# Altium PCB CurrentSenseTest_PCB.PcbDoc
Units mil, origin at the board's own origin, x right, y up, seen from the top; angles counter-clockwise.
Board outline 1000 x 900 mil, 2 copper layers (Top Layer, Bottom Layer); 10 components, 9 nets, 45 pads, 4 vias.
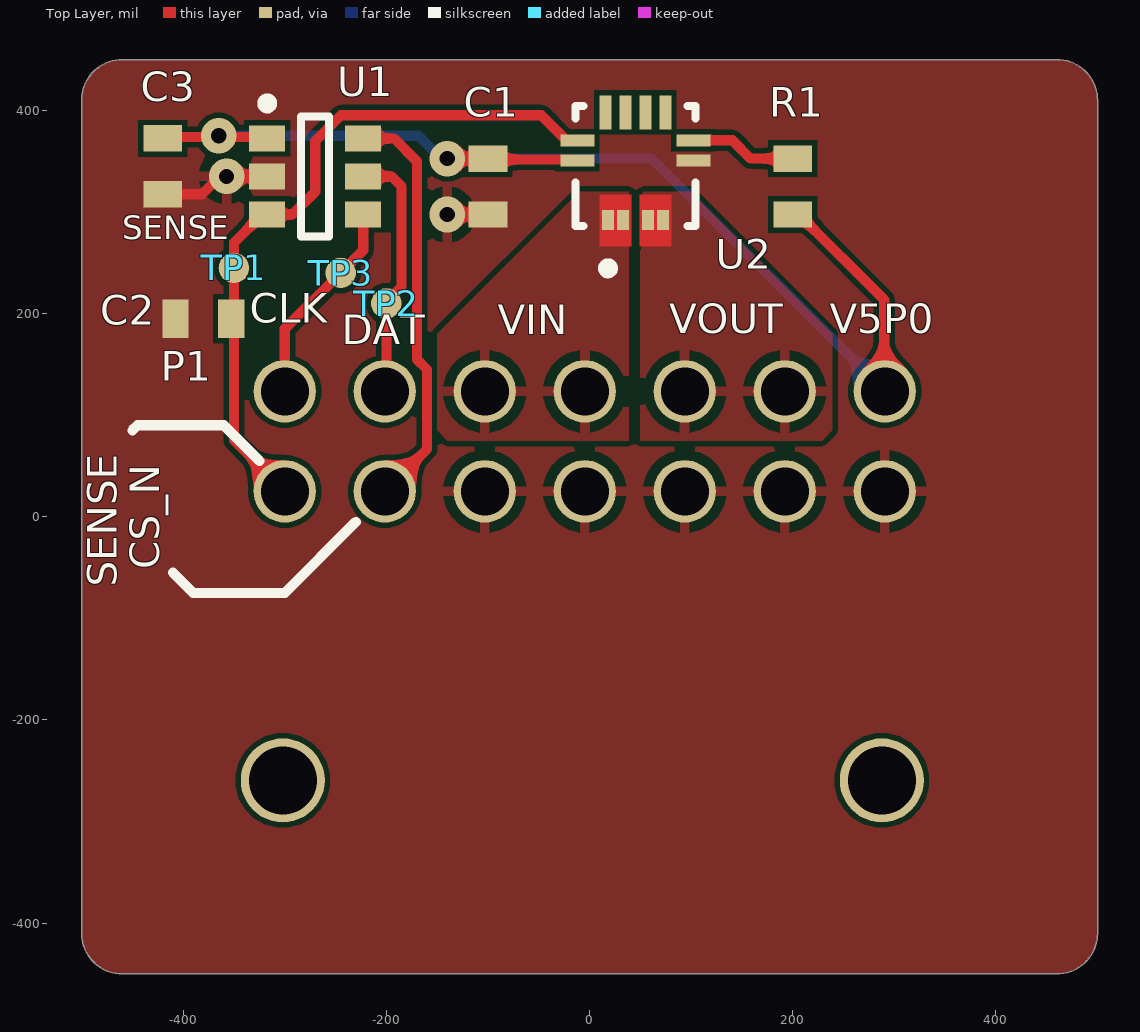
[diagram p0: Top Layer view]
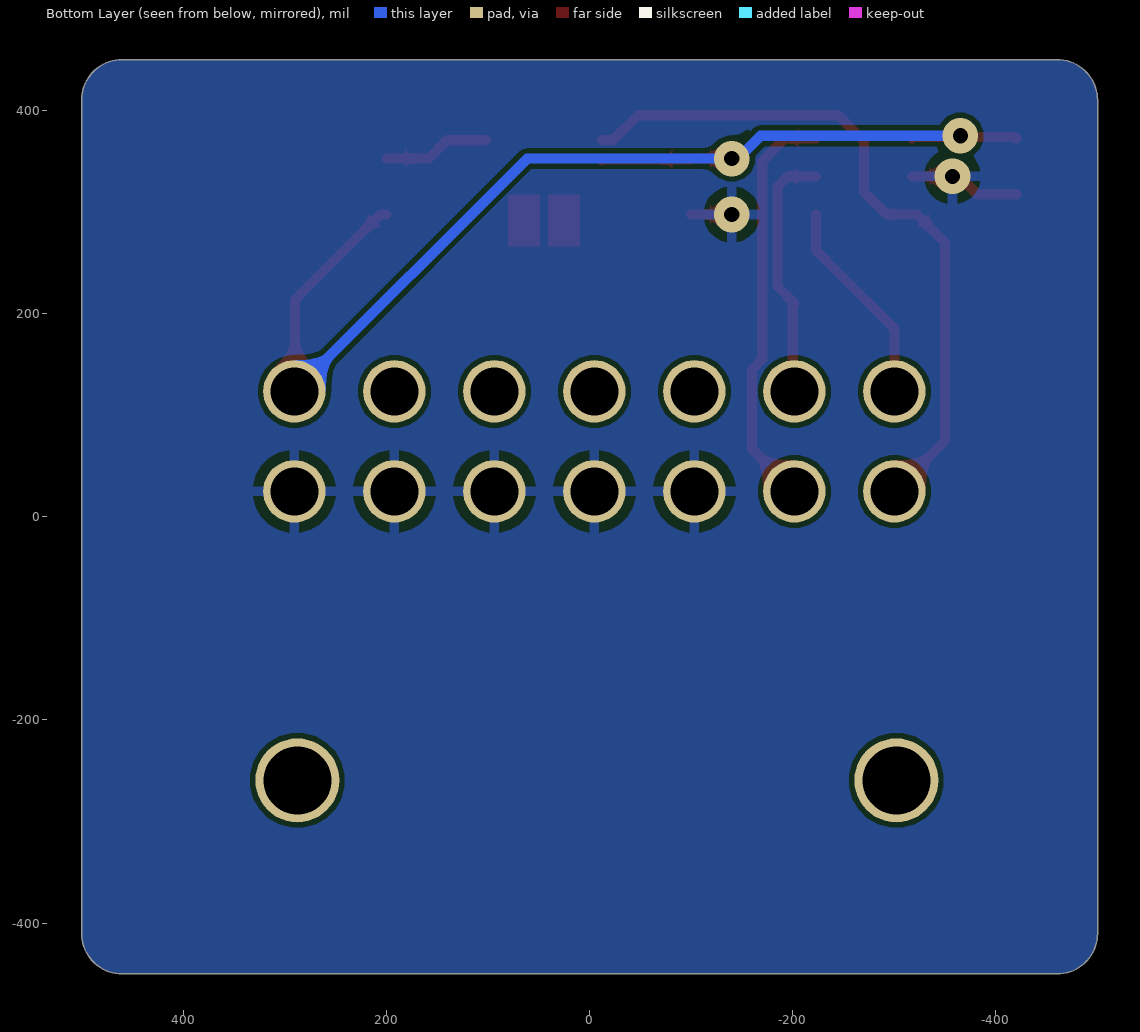
[diagram p1: Bottom Layer view, seen from below]

## Layer stack, top to bottom
Top Solder: solder mask 0.4, Solder Resist, Dk 3.5
Top Layer: signal copper 1.4
Dielectric 1: dielectric 12.6, FR-4, Dk 4.8
Bottom Layer: signal copper 1.4
Bottom Solder: solder mask 0.4, Solder Resist, Dk 3.5

## Board outline
-500,-410 -500,410 cw(c-460,410) -460,450 460,450 cw(c460,410) 500,410 500,-410 cw(c460,-410) 460,-450 -460,-450 cw(c-460,-410)

## Design rules (kind name [scope] priority, off if disabled: settings)
Clearance Clearance_1 [All] p1: gap=5 ignorepadtopadclearanceinfootprint=FALSE except(0: Arc-Hole Track-Hole SMDPad-Hole THPad-Hole Via-Hole Fill-Hole Poly-Hole Region-Hole Text-Hole Hole-Hole; 10: Region-Region)
Clearance Clearance_1 [OnMid vs OnMid] p2: gap=10 ignorepadtopadclearanceinfootprint=FALSE sourcerule=38 cellrowname=All cellrowtype=0 cellcolname=All cellcoltype=0 innerlayers=TRUE
Clearance Clearance_2 [(ExistsOnLayer('Top Layer') Or ExistsOnLayer('Bottom Layer')) vs (ExistsOnLayer('Top Layer') Or ExistsOnLayer('Bottom Layer'))] p3: gap=10 ignorepadtopadclearanceinfootprint=FALSE sourcerule=38 cellrowname=All cellrowtype=0 cellcolname=All cellcoltype=0 outerlayers=TRUE
Clearance [All] p4: gap=10 ignorepadtopadclearanceinfootprint=FALSE ismatrix=TRUE
PolygonConnect [All] p1: thpad.connectstyle=Relief thpad.reliefconductorwidth=10 thpad.reliefentries=4 thpad.polygonreliefangle="90 Angle" thpad.airgapwidth=10 smdpad.connectstyle=Direct smdpad.reliefconductorwidth=10 smdpad.reliefentries=4 smdpad.polygonreliefangle="90 Angle" smdpad.airgapwidth=10 via.connectstyle=Relief via.reliefconductorwidth=10 via.reliefentries=4 via.polygonreliefangle="90 Angle" via.airgapwidth=10
RoutingVias RoutingViaStyle_1 [All] p1: holewidth=15 width=15 viastyle="Through Hole" minholewidth=10 minwidth=10 maxholewidth=35 maxwidth=50
RoutingVias [All] p2: holewidth=28 width=50 viastyle="Through Hole" minholewidth=28 minwidth=50 maxholewidth=28 maxwidth=50
SolderMaskExpansion [All] p1: expansion=4 istentingtop=FALSE
Width [All] p1: maxlimit=10 minlimit=10 preferedwidth=10
30 further rules are at their usual default settings.

## Components (designator, comment, footprint, x,y, rotation, side; value= is the part's Value field where it differs from the comment)
C1 "0.1uF" 0603 -100,325 r270 top value="100 nF"
C2 "0.1uF" 0603 -380,195 r180 top value="100 nF"
C3 "0.1uF" 0603 -420,345 r270 top value="100 nF"
P1 "14-Pin 2-Row Nano-Fit Right Angle" "MOLEX NANO-FIT 2X7 - Right Angle" -300,25 r0 top
R1 "4K7" 0603 200,325 r90 top value="4700.00 Ohm"
TP1 "Test Point Pad" "Test Point Pad" -350,244.88 r90 top
TP2 "Test Point Pad" "Test Point Pad" -200,210 r90 top
TP3 "Test Point Pad" "Test Point Pad" -245,240 r90 top
U1 "ADC121S021CIMF/NOPB" MF06A_L -270,335 r0 top
U2 "ACS711KEXLT-15AB-T" ALEG-EX-12_V 45,345 r90 top

## Footprints (in the part's own frame and the unit in brackets; to place one, negate y for a bottom-side part, rotate by r counter-clockwise, add the part's x,y. Pads: shape width x height; smd on the part's side, far side on the other; paste and mask are expansions set on the pad)
0603 [mil]
  rect 26x38 smd: 1(-27.5,0) 2(27.5,0)
  body extent 0,0 10,10, height 10
ALEG-EX-12_V [mm] "QFN, 12-Leads, Body 3x3mm, Height 0.8mm"
  rect 0.5x0.3 smd paste-0.5 mask-0.5: 1(-1.348,0.682) 2(-1.348,0.301) 3(-1.348,-0.318) 4(-1.348,-0.699)
  rect 0.3x0.85 smd: 5(0.148,-1.45) 6(0.648,-1.45) 11(0.648,1.45) 12(0.148,1.45)
  rect 0.85x0.3 smd: 7(1.348,-0.75) 8(1.348,-0.25) 9(1.348,0.25) 10(1.348,0.75)
  Top Layer region: -2.002,0.1 -0.702,0.1 -0.702,0.9 -2.002,0.9
  Top Layer region: -2.002,-0.9 -0.702,-0.9 -0.702,-0.1 -2.002,-0.1
  silkscreen extent -2.68,-1.5 1.5,1.5, body extent -1.5,-1.5 1.5,1.5, height 0.81
MF06A_L [mm] "SOT23, 6-Leads, Body 2.9x1.6mm, Pitch 0.95mm, Lead Span 2.8mm, IPC High Density"
  rect 0.9x0.65 smd: 1(-1.2,0.95) 2(-1.2,0) 3(-1.2,-0.95) 4(1.2,-0.95) 5(1.2,0) 6(1.2,0.95)
  silkscreen extent -1.32,-1.5 0.35,1.95, body extent -0.83,-1.49 0.83,1.5, height 1.22
"MOLEX NANO-FIT 2X7 - Right Angle" [mm]
  round 1.56 hole 1.2: 1(15,2.5) 2(12.5,2.5) 3(10,2.5) 4(7.5,2.5) 5(5,2.5) 6(2.5,2.5) 7(0,2.5) 8(15,0) 9(12.5,0) 10(10,0) 11(7.5,0) 12(5,0) 13(2.5,0) 14(0,0)
  round 2.1 hole 1.7: ""(-0.05,-7.225) ""(14.925,-7.225)
  body extent -2.68,-26.05 17.53,2.78, height 10.21
"Test Point Pad" [mil]
  round 30 smd paste-99999: 1(0,0)

## Part data
C1 C2 C3: library part "0.1uF 0603", "CC0603KRX7R9BB104-CAP CER 0.1UF 50V X7R 0603", Capacitance="100 nF", Manufacturer=YAGEO, Manufacturer Part Number=CC0603KRX7R9BB104, Package=CC0603-DA, Temperature="-55°C to +125°C", Temperature Characteristic=X7R, Temperature Coefficient=15%, Temperature Range High=+125°C, Temperature Range Low=-55°C, Tolerance=0.1, VOLTAGE="50 V", Automotive=No, Category=Cap, ComponentLink2Description=Datasheet, ComponentLink2URL=http://www.yageo.com/documents/recent/UPY-GPHC_X7R_6.3V-to-50V_18.pdf, ComponentLink3Description=Link, ComponentLink3URL=https://www.digikey.com/en/products/detail/samsung-electro-mechanics/CL10B104KB8NNWC/3887593, Device Class L1="Passive Components", Device Class L2=Capacitors, Device Class L3="Ceramic Capacitors", Digikey Description="CAP CER 0.1UF 50V X7R 0603", Footprint Url=http://www.yageo.com/exep/pages/download/literatures/UPY-C_GEN_24.pdf, Height=0.9mm, Lead Free=Yes, Material=Ceramic, Mouser Description="Multilayer Ceramic Capacitor, CC Series, 0.1 - F, - 10%, X7R, 50 V, 0603 [1608 Metric]", Octopart=https://octopart.com/cc0603krx7r9bb104-yageo-42244635, RoHS=TRUE, Voltage Rating="50 V"
P1: "NanoFit Right Hdr TH DR 14Ckt", Manufacturer=Molex, Part Number=105314-1214, Supplier Part Number=538-105314-1214, ComponentLink1Description="Mouser Link", ComponentLink1URL=https://www.mouser.com/ProductDetail/Molex/105314-1214?qs=PqFvFmEiOr6wLIXpvlvqbA%3D%3D, ComponentLink2Description=Link, ComponentLink2URL=https://www.digikey.com/en/products/detail/molex/1053141114/7693193, Supplier=Mouser, Supplier 1=Mouser, Supplier Part Number 1=538-105314-1214
R1: library part "4K7 0603", "4K7 0.1W 1% 0603 (1608 Metric)  SMD", Case-EIA=0603, Case-Metric=1608, Power="0.1 W", Tolerance="1 %", ComponentLink1Description=Link, ComponentLink1URL=https://www.digikey.com/en/products/detail/yageo/RC0603FR-074K7L/727212, Technology=SMT
TP1 TP2 TP3: "Test point, Pad, 30 mil"
U1: library part CMP-0054-00265-2, "Single Channel, 50 to 200 kSPS, 12-Bit A/D Converter, 6-pin SOT-23, Pb-Free", Manufacturer="National Semiconductor", PackageTopMarking=X07C*XTT, PowerWise=Y, Code_IPC=SOT26A-6, Code_JEDEC=MO-178-AB, ComponentLink1Description="ADC121S021 Datasheet", ComponentLink1URL=http://www.national.com/ds/AD/ADC121S021.pdf, ComponentLink2Description="ADC121S021 Web Page", ComponentLink2URL=http://www.national.com/pf/AD/ADC121S021.html, ComponentLink3Description="MF06A Package Page", ComponentLink3URL=http://www.national.com/packaging/folders/mf06a.html, CompType="ADC IC", DatasheetVersion=Jan-2010, PackageDescription="Molded SOT-23, .115 x .063 x .040in Body, 6 Lead, .0375in in Pitch", PackageReference=MF06A, PackageVersion="revC, Sep-2005", PinCount=6, RevisionNote="Component URLs added", RoHS=Y
U2: library part CMP-1557-00001-1, "Hall Effect Linear Current Sensor with Overcurrent Fault Output for <100 V Isolation Applications, 3 to 5.5 V, -15.5 to 15.5 A IP, -40 to 125 degC, 12-Pin QFN (EX), RoHS, Tape and Reel", Temperature Max="125 degC", Temperature Min="-40 degC", -3dB Bandwidth="0.1 MHz", ComponentLink1Description="Manufacturer URL", ComponentLink1URL=http://www.allegromicro.com/, ComponentLink2Description=Datasheet, ComponentLink2URL=http://www.allegromicro.com/~/media/Files/Datasheets/ACS711-Datasheet.ashx?la=en, ComponentLink3Description="Package Specification", ComponentLink3URL=http://www.allegromicro.com/~/media/Files/Datasheets/ACS711-Datasheet.ashx?la=en, DatasheetVersion="Rev. 3", IP Max="15.5 A", IP Min="-15.5 A", Mounting Technology="Surface Mount", PackageDescription="12-Pin Quad Flat No-Lead, Body 3 x 3 mm, Height 0.8 mm", Packing="Tape and Reel", PartNumber=ACS711KEXLT-15AB-T, RoHS=TRUE, VCC Max="5.5 V", VCC Min="3 V"

## Via types
v1: diameter 35, hole 15, Top Layer to Bottom Layer, 4 vias

## Nets (pads, with @x,y where several pads share a name; then routed paths per layer and width w, separated by ;. In a path a pad name is that pad's centre, name@x,y a point inside that pad or via, vN(x,y) a via of type N, cw(c..) or ccw(c..) an arc to the next point about the centre after c; other vN are vias at no path point)
ADC_CLK: P1.7 TP3.1 U1.4 | length 206.2
  Top Layer w10: P1.7 -300,185 TP3.1 -222.76,262.24 U1.4
GND: C1.2 C2.2 C3.2 P1.8 P1.9 P1.10 P1.11 P1.12 U1.2 U2.5 | length 150
  Top Layer w10: C3.2 -381.51,317.5 -364.01,335 v1(-357.24,335) U1.2 ; v1(-140,297.5) C1.2
NetR1_2: R1.2 U2.6 | length 105.4
  Top Layer w10: U2.6 140.45,370.51 158.46,352.5 R1.2
V5P0: C1.1 C3.1 P1.1 R1.1 U1.1 U2.12 | length 1208.3
  Top Layer w10: C3.1 -418.75,373.75 -366.25,373.75 v1(-365,375) -363.7,373.7 -318.54,373.7 U1.1 ; v1(-140,352.5) C1.1 -99.16,351.66 -12.92,351.66 U2.12 ; R1.1 206,297.5 290,213.5 290,123.98 P1.1
  Bottom Layer w10: v1(-365,375) -168.34,375 -145.84,352.5 61.48,352.5 P1.1
V_DATA: P1.6 TP2.1 U1.5 | length 251
  Top Layer w10: U1.5 -195,335 -185,325 -185,226.57 TP2.1@-201.57,210 ; P1.6 -200,125 TP2.1
V_SENSE: C2.1 P1.14 TP1.1 U1.3 U2.11 | length 694.7
  Top Layer w10: P1.14 -350,75 -350,220 -350,269.76 -322.17,297.6 -292.4,297.6 -270,320 -270,369.81 -244.61,395.2 -47.6,395.2 -22.91,370.51 U2.11
V_SENSE_CS_N: P1.13 U1.6 | length 408.4
  Top Layer w10: U1.6 -192.4,372.4 -170,350 -170,155 -160,145 -160,66.57 P1.13
VIN: P1.4 P1.5 U2.1 U2.2
VOUT: P1.2 P1.3 U2.3 U2.4
pads on no net: P1. U2.7 U2.8 U2.9 U2.10

## Polygon pours and split planes (outlines as drawn)
GND on Top Layer "GND_L01_P002" (solid, remove dead copper, pour order 2): -500,-410 -500,410 cw(c-460,410) -460,450 460,450 cw(c460,410) 500,410 500,-410 cw(c460,-410) 460,-450 -460,-450 cw(c-460,-410)
VOUT on Top Layer "VOUT_L01_P001" (solid, pour order 1): 50,320 50,75 228.98,75 238.98,85 238.98,180 98.98,320
VIN on Top Layer "VIN_L01_P000" (solid, pour order 0): 38.43,320 38.43,75 -140,75 -150,85 -150,180 -10,320
GND on Bottom Layer "GND_L02_P003" (solid, remove dead copper, pour order 3): -500,-410 -500,410 cw(c-460,410) -460,450 460,450 cw(c460,410) 500,410 500,-410 cw(c460,-410) 460,-450 -460,-450 cw(c-460,-410)

## Silkscreen, mask and mechanical layers (free items; w line width, h text height)
Top Overlay:
  lines w10: -450,85 -445,90 -360,90 -325,55 ; -410,-55 -390,-75 -300,-75 -230,-5
  text "SENSE" at -460,265.48 h40
  text "CLK" at -334.58,181.33 h50
  text "VOUT" at 78.42,170.55 h50
  text "V5P0" at 236.49,170.55 h50
  text "VIN" at -90.42,170 h50
  text "DAT" at -243.83,160 h50
  text "CS_N" at -413.82,-51.7 h50 r90
  text "SENSE" at -455.58,-68.76 h50 r90
Mechanical 15:
  the board outline again, w10